# Altium PCB M2梅花焊盘_2025-10-07.pcbdoc
Units mm, origin at the board's own origin, x right, y up, seen from the top; angles counter-clockwise.
Board outline 30.82 x 30.31 mm, 2 copper layers (Top Layer, Bottom Layer); 1 components, 0 nets, 1 pads, 8 vias.
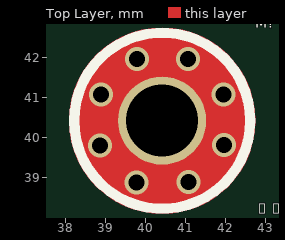
[diagram p0: Top Layer view]
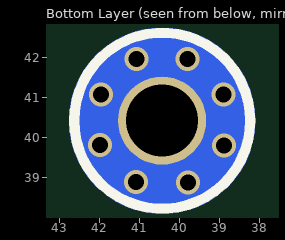
[diagram p1: Bottom Layer view, seen from below]

## Layer stack, top to bottom
Top Layer: signal copper (thickness not stored)
Dielectric: dielectric 0.32, FR-4, Dk 4.8
Bottom Layer: signal copper (thickness not stored)

## Board outline
56.216,25.4 25.4,25.4 25.4,55.708 56.216,55.708

## Components (designator, comment, footprint, x,y, rotation, side; value= is the part's Value field where it differs from the comment)
M? "M2梅花焊盘" M2梅花焊盘 40.427,40.427 r0 top

## Footprints (in the part's own frame and the unit in brackets; to place one, negate y for a bottom-side part, rotate by r counter-clockwise, add the part's x,y. Pads: shape width x height; smd on the part's side, far side on the other; paste and mask are expansions set on the pad)
M2梅花焊盘 [mm]
  round 2.2 hole 1.8 paste+0 mask+0.051: 1(0,0)
  Top Layer region: -2.327,0 -2.097,1.01 -1.451,1.819 -0.518,2.269 0.518,2.269 1.451,1.819 2.097,1.01 2.327,0 2.327,0 2.327,0 2.097,-1.01 1.451,-1.819 0.518,-2.269 -0.518,-2.269 -1.451,-1.819 -2.097,-1.01 -2.327,0 -2.327,0 -2.327,0 -2.327,0
  Bottom Layer region: -2.327,0 -2.097,1.01 -1.451,1.819 -0.518,2.269 0.518,2.269 1.451,1.819 2.097,1.01 2.327,0 2.327,0 2.327,0 2.097,-1.01 1.451,-1.819 0.518,-2.269 -0.518,-2.269 -1.451,-1.819 -2.097,-1.01 -2.327,0 -2.327,0 -2.327,0 -2.327,0
  silkscreen extent -2.2,-2.2 2.2,2.2

## Via types
v1: diameter 0.6, hole 0.4, Top Layer to Bottom Layer, tented both sides, 8 vias

## Nets (pads, with @x,y where several pads share a name; then routed paths per layer and width w, separated by ;. In a path a pad name is that pad's centre, name@x,y a point inside that pad or via, vN(x,y) a via of type N, cw(c..) or ccw(c..) an arc to the next point about the centre after c; other vN are vias at no path point)
pads on no net: M?.1
copper on no net:
  other v1: 39.787,38.887 41.087,38.897 38.877,39.807 41.977,39.817 38.897,41.077 41.957,41.087 39.797,41.967 41.067,41.967

## Silkscreen, mask and mechanical layers (free items; w line width, h text height)
Document:
  lines w0.003: 40.808,40.554 40.808,40.554